# EAGLE board uRADMonitor Pops (EAGLE 7.1.0)
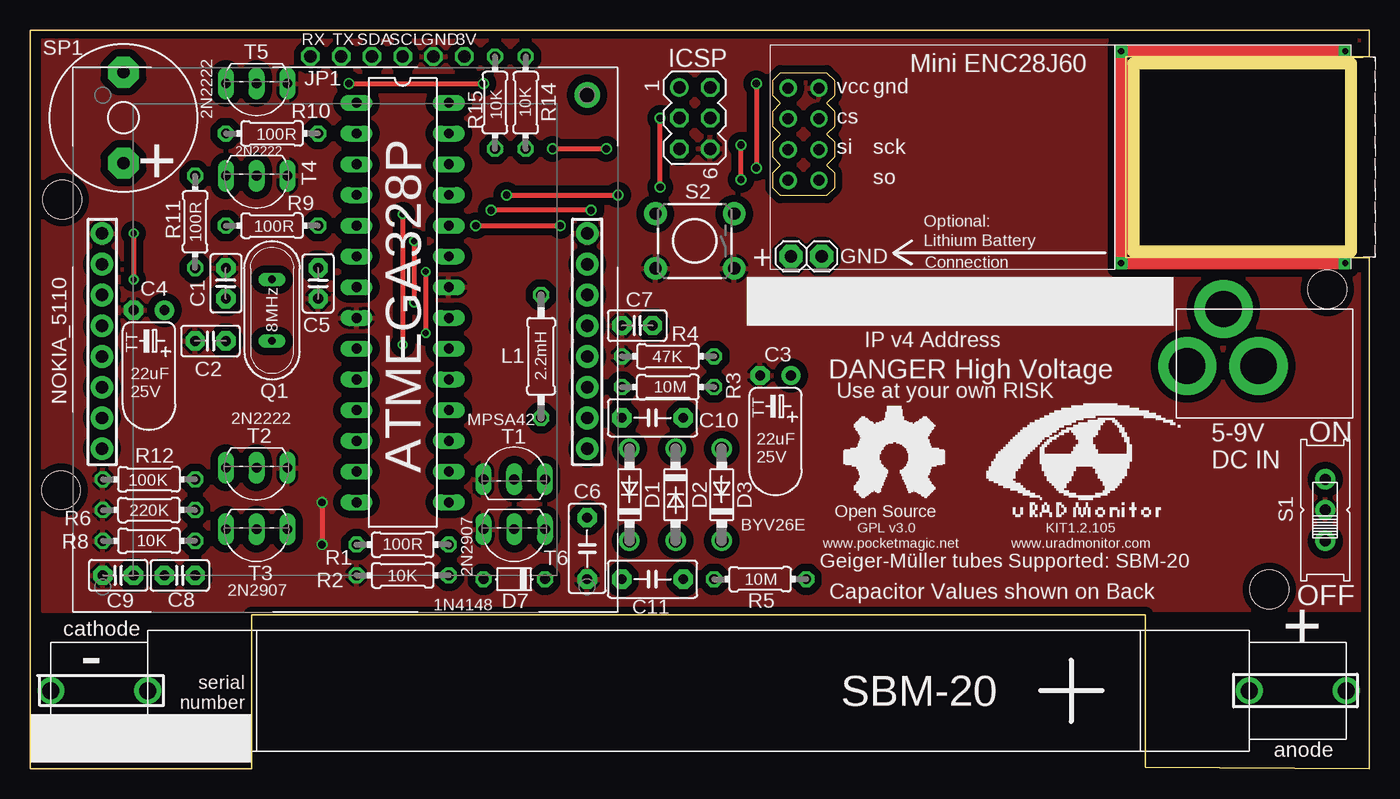
[diagram p0: board, top side]
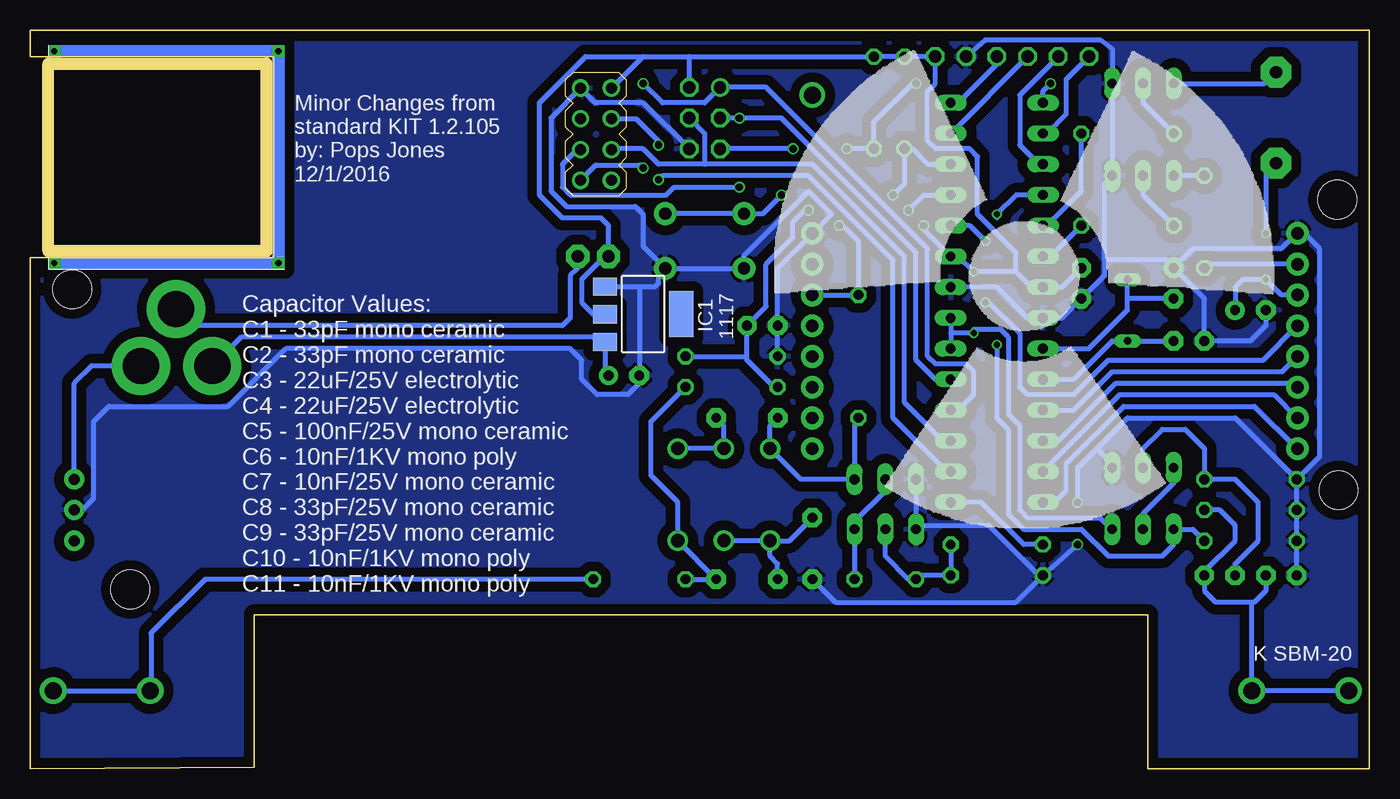
[diagram p1: board, bottom side, seen from below]

Size 110.6 x 61 mm. Coordinates in mm from the lower left corner, seen from the top.
Outline: 0,0 18.3,0 18.3,12.7 92.1,12.7 92.1,0.1 110.6,0 110.6,42.2 90.5,42.2 90.5,58.8 110.6,58.8 110.6,61 0,61 0,0
Copper layers (1*16): Top 0.035mm / dielectric 1.5mm / Bottom 0.035mm
Design rules "EagleRules": minimum track width 7mil, minimum drill 12mil, track to track 7mil, track to pad 7mil, pad to pad 7mil, via to via 7mil, smd to smd 0mil, copper to edge 20mil, drill to drill 10mil, minimum pad ring 10mil, minimum via ring 6mil, stop-mask expansion 2mil, vias tented up to drill 25mil, thermal gap 10mil
Holes 3.17 mm at 102.34,14.8 107.14,39.6 2.54,23 2.64,47

## Footprints (pad centres in the part's own frame; a part is rotated, then mirrored left to right if it is on the bottom)
1X01 = drill 1.016 pad 1.93 octagon: 1 0,0
DIL28-3 = drill 0.813 long: 1 -16.51,-3.81; 2 -13.97,-3.81; 3 -11.43,-3.81; 4 -8.89,-3.81; 5 -6.35,-3.81; 6 -3.81,-3.81; 7 -1.27,-3.81; 8 1.27,-3.81; 9 3.81,-3.81; 10 6.35,-3.81; 11 8.89,-3.81; 12 11.43,-3.81; 13 13.97,-3.81; 14 16.51,-3.81; 15 16.51,3.81; 16 13.97,3.81; 17 11.43,3.81; 18 8.89,3.81; 19 6.35,3.81; 20 3.81,3.81; 21 1.27,3.81; 22 -1.27,3.81; 23 -3.81,3.81; 24 -6.35,3.81; 25 -8.89,3.81; 26 -11.43,3.81; 27 -13.97,3.81; 28 -16.51,3.81
C2.5-2 = drill 0.813 pad 1.6 octagon: 1 -1.27,0; 2 1.27,0
TT2D4L = drill 0.813 pad 1.6: + -1.27,0 | drill 0.813 pad 1.6 octagon: - 1.27,0
C5B3 = drill 0.813 pad 1.6 octagon: 1 -2.54,0; 2 2.54,0
DO41-7.6 = drill 1.1 pad 1.7: A 3.81,0; C -3.81,0
D-5 = drill 0.813 octagon: A 2.54,0; C -2.54,0
PJ-102A = drill 3 pad 4.8: RING 0.1,-3.39; RING_SW -4.6,-6.29; TIP 0.1,-9.29
SOT223 = smd 1.499 x 2.007: 1 -2.261,-3.15; 2 0.025,-3.15; 3 2.311,-3.15 | smd 3.81 x 2.007: 4 0,3.15
ENC28J60_MINI = drill 0.9 pad 1.422: CS -21.503,3.433; GND -18.962,5.973; P$1 -21.503,-1.647; P$6 -18.962,3.433; SCK -18.962,0.892; SI -21.503,0.892; SO -18.962,-1.647; VCC -21.503,5.973 | drill 0.5 pad 1 square: P$2 24.5,9; P$3 24.5,-8.5; P$4 6,-8.5; P$5 6,9
MA03-2 = drill 1.016: 1 -2.54,-1.27 | drill 1.016 octagon: 2 -2.54,1.27; 3 0,-1.27; 4 0,1.27; 5 2.54,-1.27; 6 2.54,1.27
1X06-CLEAN = drill 1.016 octagon: 1 -6.35,0; 2 -3.81,0; 3 -1.27,0; 4 1.27,0; 5 3.81,0; 6 6.35,0
0207/10 = drill 0.813 octagon: 1 -5.08,0; 2 5.08,0
NOKIA5110 = drill 1.016 pad 1.88: CE@1 2.53,0; CE@2 2.53,40.08; CLK@1 10.15,0; CLK@2 10.15,40.08; DC@1 5.07,0; DC@2 5.07,40.08; DIN@1 7.61,0; DIN@2 7.61,40.08; GND@1 17.77,0; GND@2 17.77,40.08; LIGHT@1 15.23,0; LIGHT@2 15.23,40.08; RST@1 -0.01,0; RST@2 -0.01,40.08; VCC@1 12.69,0; VCC@2 12.69,40.08
QS = drill 0.61 long: 1 -2.54,0; 2 2.54,0
0204/7 = drill 0.813 octagon: 1 -3.81,0; 2 3.81,0
EG1218 = drill 0.9 pad 1.676: O -2.54,0; P 0,0; S 2.54,0
TACTILE-PTH = drill 1.016 pad 1.88: 1 -3.251,2.261; 2 3.251,2.261; 3 -3.251,-2.261; 4 3.251,-2.261
AL60P = drill 1.016 pad 2.54 octagon: 1 -3.759,0; 2 3.759,0
TO92-EBC-OVAL = drill 0.813 long: B 0,-1.27; C 2.54,-1.27; E -2.54,-1.27
TO92-EBC = drill 0.813 long: B 0,-1.27; C 2.54,-1.27; E -2.54,-1.27
GEIGERTUBE_SBM20_6MM_HOLDERS = drill 1.4 pad 2.2: ANODE$1 47.5,0; ANODE$2 55.5,0; CATHODE$1 -51.5,0; CATHODE$2 -43.5,0

## Placement (x,y rotation side)
+3V_BAT  pin 1x1  [1X01]  62.83,42.31 0 top
ATMEGA328P  ATMEGA328P  [DIL28-3]  30.76,38.5 270 top
C1  33pF  [C2.5-2]  16.16,40.09 270 top
C2  33pF  [C2.5-2]  14.89,35.33 0 top
C3  22u / 25V  [TT2D4L]  61.56,32.47 180 top
C4  22u / 25V  [TT2D4L]  9.81,37.87 180 top
C5  100nF  [C2.5-2]  23.78,40.09 90 top
C6  10nF/1KV  [C5B3]  46,18.19 270 top
C7  10nF  [C2.5-2]  50.13,36.6 0 top
C8  33pF  [C2.5-2]  12.35,15.96 0 top
C9  33pF  [C2.5-2]  7.27,15.96 180 top
C10  10nF/1KV  [C5B3]  51.4,28.98 180 top
C11  10nF/1KV  [C5B3]  51.4,15.65 180 top
D1  BYV26E  [DO41-7.6]  49.5,22.63 90 top
D2  BYV26E  [DO41-7.6]  53.3,22.63 270 top
D3  BYV26E  [DO41-7.6]  57.12,22.63 90 top
D7  1N4148  [D-5]  39.97,15.65 180 top
DC_IN_JACK  DC IN JACK  [PJ-102A]  104.85,33.36 270 top
GND  pin 1x1  [1X01]  65.37,42.31 0 top
IC1  REG1117  [SOT223]  59.97,37.55 270 bottom
IC2  ENC28J60_MINI  [ENC28J60_MINI]  84.1,50.25 0 top
ISP_6PIN  pin 2x3  [MA03-2]  54.89,53.74 270 top
JP1  pin 1x6  [1X06-CLEAN]  29.49,58.83 0 top
L1  2.2mH  [0207/10]  42.19,34.06 270 top
NOKIA_5110  NOKIA_5110_LCD  [NOKIA5110]  46,26.44 90 top
Q1  8Mhz  [QS]  19.97,37.87 90 top
R1  100  [0204/7]  30.76,18.5 0 top
R2  10K  [0204/7]  30.76,15.96 0 top
R3  10M  [0204/7]  52.67,31.52 0 top
R4  47K  [0204/7]  52.67,34.06 180 top
R5  10M  [0204/7]  60.29,15.65 0 top
R6  220K  [0204/7]  9.81,21.36 0 top
R8  10K  [0204/7]  9.81,18.82 180 top
R9  100  [0204/7]  19.97,44.86 180 top
R10  100  [0204/7]  19.97,52.48 180 top
R11  100  [0204/7]  13.62,45.17 90 top
R12  100K  [0204/7]  9.81,23.9 180 top
R14  10K  [0204/7]  40.92,55.02 90 top
R15  10K  [0204/7]  38.38,55.02 90 top
S1  Toggle switch  [EG1218]  106.96,21.36 90 top
S2  Momentary switch  [TACTILE-PTH]  54.89,43.59 180 top
SP1  SPEAKER  [AL60P]  7.7,53.77 90 top
T1  MPSA42  [TO92-EBC-OVAL]  39.97,25.17 0 top
T2  2N2222  [TO92-EBC]  18.7,23.58 180 top
T3  2N2907  [TO92-EBC-OVAL]  18.7,18.5 180 top
T4  2N2222  [TO92-EBC]  18.7,47.71 180 top
T5  2N2222  [TO92-EBC-OVAL]  18.7,55.33 180 top
T6  2N2907  [TO92-EBC-OVAL]  39.97,18.5 180 top
TUBE1  GEIGERTUBE_SBM20_6MM_HOLDERS  [GEIGERTUBE_SBM20_6MM_HOLDERS]  53.2,6.43 0 top

## Library data of the parts
+3V_BAT DC_IN_JACK GND JP1 S1 SP1 T1 T3 T5 T6 = adafruit
ATMEGA328P = atmel; OC_FARNELL: unknown; OC_NEWARK: unknown
C1 C2 C5-C11 = capacitor-wima
C3 C4 L1 R1-R6 R8-R12 R14 R15 = rcl
D1-D3 D7 = diode
IC1 = burr-brown; MPN: REG1117; OC_FARNELL: 1097566; OC_NEWARK: 14P6981
IC2 TUBE1 = uradmonitor
ISP_6PIN = con-lstb; OC_FARNELL: unknown; OC_NEWARK: unknown
NOKIA_5110 = pocketmagic
Q1 = special
S2 = sparkfun-electromechanical
T2 T4 = transistor-neu-to92

## Nets
BUTTON_SIGNAL: ATMEGA328P.26 R15.1 S2.3 S2.4
CS_ETH: ATMEGA328P.16 IC2.CS
GND: ATMEGA328P.8 ATMEGA328P.22 C1.1 C2.1 C3.- C4.- C5.1 C6.2 C7.1 C9.2 IC1.1 IC2.GND ISP_6PIN.6 JP1.5 NOKIA_5110.GND@1 NOKIA_5110.GND@2 R2.1 R4.2 R6.1 R8.2 R12.2 S1.P S2.1 S2.2 T1.E T2.E T4.E T5.E T6.C
MCU_HV_ADC: ATMEGA328P.25 C7.2 R3.1 R4.1
MCU_INT0: ATMEGA328P.4 R8.1 T3.C
MCU_MISO: ATMEGA328P.18 IC2.SO ISP_6PIN.1
MCU_MOSI: ATMEGA328P.17 IC2.SI ISP_6PIN.4
MCU_PWM_INVERTER: ATMEGA328P.15 R1.1
MCU_RESET: ATMEGA328P.1 ISP_6PIN.5 R14.1
MCU_RX: ATMEGA328P.2 JP1.1
MCU_SCK: ATMEGA328P.19 IC2.SCK ISP_6PIN.3
MCU_SCL: ATMEGA328P.28 JP1.4
MCU_SDA: ATMEGA328P.27 JP1.3
MCU_TX: ATMEGA328P.3 JP1.2
N$1: ATMEGA328P.9 C1.2 Q1.2
N$2: ATMEGA328P.10 C2.2 Q1.1
N$3: R11.2 T4.C
N$4: R5.2 TUBE1.ANODE$1 TUBE1.ANODE$2
N$7: R9.2 T4.B
N$9: NOKIA_5110.LIGHT@1 NOKIA_5110.LIGHT@2 R11.1
N$10: C10.2 D1.A L1.2 T1.C
N$13: ATMEGA328P.24 NOKIA_5110.CLK@1 NOKIA_5110.CLK@2
N$15: DC_IN_JACK.RING S1.S
N$16: C10.1 D2.C D3.A
N$20: DC_IN_JACK.RING_SW GND.1
N$21: ATMEGA328P.11 NOKIA_5110.DIN@1 NOKIA_5110.DIN@2
N$22: ATMEGA328P.12 NOKIA_5110.DC@1 NOKIA_5110.DC@2
N$23: ATMEGA328P.13 NOKIA_5110.CE@1 NOKIA_5110.CE@2
N$24: ATMEGA328P.14 NOKIA_5110.RST@1 NOKIA_5110.RST@2
N$27: D7.A R1.2 R2.2 T6.B
N$28: C3.+ DC_IN_JACK.TIP IC1.3
N$30: C6.1 C11.2 D1.C D2.A
N$31: C11.1 D3.C R3.2 R5.1
N$34: ATMEGA328P.6 R9.1
N$40: SP1.2 T5.C
N$41: R10.2 T5.B
N$52: C8.2 C9.1 R6.2 TUBE1.CATHODE$1 TUBE1.CATHODE$2
N$56: C8.1 R12.1 T2.B
N$59: T2.C T3.B
N$74: D7.C T1.B T6.E
SPEAKER_CONTROL: ATMEGA328P.5 R10.1
VCC_3V: +3V_BAT.1 ATMEGA328P.7 ATMEGA328P.20 ATMEGA328P.21 ATMEGA328P.23 C4.+ C5.2 IC1.2 IC2.VCC ISP_6PIN.2 JP1.6 L1.1 NOKIA_5110.VCC@1 NOKIA_5110.VCC@2 R14.2 R15.2 SP1.1 T3.E

## Tracks (layer width: path | path; a pad name or v marks a point on that pad's centre or on a via)
BUTTON_SIGNAL  (via drill 0.6 pad 0.25)
  Top 0.406: v39.34,47.39 v48.54,47.39
  Bottom 0.406: 35.52,49.94 ATMEGA328P.26 36.48,49.94 37.75,51.2 R15.1 38.38,48.35 v39.34,47.39 | S2.3 S2.4 50.09,45.85 v48.54,47.39
CS_ETH  (via drill 0.6 pad 0.3)
  Top 0.406: v58.7,48.66 v58.7,51.52
  Bottom 0.406: v58.7,48.66 58.38,48.98 46.32,48.98 39.34,42 39.34,28.98 34.89,24.53 ATMEGA328P.16 | IC2.CS 60.55,53.69 58.7,51.84 v58.7,51.52
GND  (via drill 0.6 pad 0.25)
  Top 0.406: v24.1,21.99 v24.1,18.5
  Bottom 0.406: R12.2 R6.1 R8.2 C9.2 | JP1.5 31.71,60.21 22.19,60.21 21.24,59.46 T5.E T4.E 21.87,48.35 21.87,42 | R12.2 4.09,25.8 4.09,42.95 5.36,44.22 NOKIA_5110.GND@2 5.93,44.22 6,44.22 7.27,42.95 14.57,42.95 15.52,42 | ATMEGA328P.22 30.76,39.77 28.22,37.23 ATMEGA328P.8 25.37,37.23 C5.1 21.87,40.73 21.87,42 | 15.52,42 C1.1 13.62,38.82 C2.1 9.81,35.33 8.54,36.6 C4.- | 15.52,42 21.87,42 | ISP_6PIN.6 59.97,55.02 63.93,55.02 IC2.GND 65.14,56.2 67.59,53.74 67.59,47.71 66.32,46.44 60.61,46.44 59.97,45.81 59.97,43.15 S2.1 | 22.51,26.44 24.1,24.85 v24.1,21.99 | 22.51,26.44 19.97,28.98 11.08,28.98 R12.2 | R2.1 v24.1,18.5 | T1.E 37.43,20.09 | T6.C 37.43,20.09 | 37.43,20.09 31.4,20.09 27.27,15.96 R2.1 | R2.1 29.18,13.74 44.1,13.74 C6.2 | R4.2 C7.1 48.86,41.35 NOKIA_5110.GND@1 | NOKIA_5110.GND@1 | NOKIA_5110.GND@1 44.41,45.81 46.32,47.71 51.64,42.39 S2.2 S2.1 | S2.1 58.14,41.29 | S2.1 58.7,40.77 58.7,40.09 58.98,39.81 IC1.1 60.33,39.81 60.29,39.77 C3.- 60.29,31.84 61.24,30.89 63.78,30.89 65.05,32.16 65.05,33.74 66,34.7 89.5,34.7 94.26,29.93 104.1,29.93 105.38,28.66 105.38,22.31 106.33,21.36 S1.P | T2.E 21.24,25.17 22.51,26.44
  pour Top (isolate 0.61): 1.1,60.5 110.2,60.5 110.2,58.9 90.3,58.9 90.3,42 110.1,41.9 109.8,13.1 1.1,13
  pour Bottom (isolate 0.813): 1.1,60.5 109.6,60.7 110,60.7 110,59 90.4,59 90.4,41.9 110.1,41.9 110.1,41.6 109.7,0.4 92.4,0.3 92.4,12.9 17.8,12.9 17.8,0.5 1.1,0.5
MCU_HV_ADC  (via drill 0.6 pad 0.25)
  Top 0.406: v46.32,46.12 v38.07,46.12
  Bottom 0.406: ATMEGA328P.25 36.8,47.39 v38.07,46.12 | R3.1 49.18,31.52 51.4,33.74 51.4,34.06 | 51.4,34.06 C7.2 49.81,38.19 49.81,41.68 47.59,43.9 47.59,45.17 46.64,46.12 v46.32,46.12 | R4.1 51.4,34.06
MCU_INT0  (via drill 0.5 pad 0.25)
  Top 0.406: v30.77,45.79 30.78,45.48 30.76,45.49 v30.76,35.01
  Bottom 0.406: v30.76,35.01 30.76,28.98 29.81,28.03 29.81,21.04 28.54,19.77 23.78,19.77 21.55,17.55 17.11,17.55 16.16,18.5 T3.C 14.57,19.77 R8.1 | 30.75,45.49 v30.77,45.79 29.16,47.39 ATMEGA328P.4
MCU_MISO  (via drill 0.6 pad 0.25)
  Top 0.406: v59.97,56.6 v59.97,49.62
  Bottom 0.406: IC2.SO 63.9,49.86 60.21,49.86 v59.97,49.62 | v59.97,56.6 58.38,55.02 54.89,55.02 ISP_6PIN.1 49.81,56.28 36.48,42.95 36.48,34.06 35.84,33.42 33.3,33.42 32.67,32.79 32.67,30.89 33.94,29.62 ATMEGA328P.18
MCU_MOSI
  Bottom 0.406: 54.89,49.94 46,49.94 38.38,42.31 38.38,30.25 35.21,27.08 ATMEGA328P.17 | ISP_6PIN.4 54.89,52.48 54.89,49.94 | 54.89,49.94 58.7,49.94 59.97,51.2 62.54,51.2 IC2.SI
MCU_PWM_INVERTER
  Bottom 0.406: R1.1 28.54,18.5 32.03,21.99 ATMEGA328P.15
MCU_RESET  (via drill 0.6 pad 0.25, 0.6 pad 0.41)
  Top 0.406: v26.32,56.6 v37.43,56.6 | v43.15,51.2 v47.59,51.2
  Bottom 0.406: ATMEGA328P.1 26.95,55.97 v26.32,56.6 | v37.43,56.6 37.75,56.6 40.92,53.43 R14.1 v43.15,51.2 | v47.59,51.2 ISP_6PIN.5
MCU_RX
  Bottom 0.406: JP1.1 25.05,56.92 25.05,54.06 26.64,52.48 ATMEGA328P.2
MCU_SCK  (via drill 0.6 pad 0.25)
  Top 0.406: v52.04,48.03 v52.04,53.74
  Bottom 0.406: IC2.SCK 65.2,51.2 65.37,51.2 66.64,49.94 66.64,48.03 66,47.39 58.07,47.39 57.43,48.03 v52.04,48.03 | ATMEGA328P.19 35.84,32.16 37.43,33.74 37.43,42.63 48.54,53.74 v52.04,53.74 ISP_6PIN.3
MCU_SCL
  Bottom 0.406: JP1.4 30.76,58.19 33.94,55.02 ATMEGA328P.28
MCU_SDA
  Bottom 0.406: JP1.3 ATMEGA328P.27
MCU_TX
  Bottom 0.406: ATMEGA328P.3 27.27,49.94 28.86,51.52 28.86,55.65 JP1.2
N$1
  Bottom 0.406: ATMEGA328P.9 23.14,34.7 19.97,37.87 19.97,38.82 | 19.97,38.82 Q1.2 | C1.2 19.97,38.82
N$2
  Bottom 0.406: C2.2 Q1.1 21.24,35.33 24.41,32.16 ATMEGA328P.10
N$3
  Bottom 0.406: R11.2 T4.C
N$4
  Bottom 0.406: TUBE1.ANODE$2 TUBE1.ANODE$1 100.61,6.43 100.61,11.2 96.17,15.65 R5.2
N$7
  Bottom 0.406: T4.B 18.7,47.39 R9.2
N$9
  Bottom 0.406: NOKIA_5110.LIGHT@2 13.31,41.67 R11.1
N$10
  Bottom 0.406: C10.2 49.5,28.34 D1.A 46.95,23.9 T1.C 42.51,28.66 L1.2
N$13  (via drill 0.5 pad 0.25)
  Top 0.406: v31.71,43.59 v31.71,38.5
  Bottom 0.406: 5.93,36.6 NOKIA_5110.CLK@2 8.77,33.74 21.55,33.74 24.41,30.89 28.22,30.89 28.86,31.52 28.86,35.97 31.4,38.5 v31.71,38.5 | ATMEGA328P.24 32.98,44.86 v31.71,43.59
N$15
  Bottom 0.406: DC_IN_JACK.RING 105.54,33.26 106.96,31.84 S1.S
N$16
  Bottom 0.406: D3.A D2.C 53.3,28.34 C10.1
N$20
  Bottom 0.406: GND.1 65.37,41.36 66,40.73 66,37.23 66.64,36.6 97.2,36.6 DC_IN_JACK.RING_SW
N$21
  Bottom 0.406: ATMEGA328P.11 24.41,29.62 21.24,32.79 7.18,32.79 NOKIA_5110.DIN@2
N$22
  Bottom 0.406: ATMEGA328P.12 25.68,27.08 20.92,31.84 6.31,31.84 6,31.52 5.93,31.52 NOKIA_5110.DC@2
N$23
  Bottom 0.406: NOKIA_5110.CE@2 5.93,28.98 6,28.98 7.9,30.89 20.6,30.89 ATMEGA328P.13
N$24
  Bottom 0.406: NOKIA_5110.RST@2 5.93,26.44 6,26.44 9.49,29.93 20.29,29.93 25.05,25.17 25.05,22.95 26,21.99 ATMEGA328P.14
N$27
  Bottom 0.406: R1.2 R2.2 37.11,15.96 D7.A 38.07,15.65 39.97,17.55 T6.B
N$28
  Bottom 0.406: 63.03,35.33 IC1.3 | IC1.3 63.69,35.24 64.1,35.65 93.17,35.65 DC_IN_JACK.TIP | IC1.3 63.12,32.77 C3.+
N$30
  Bottom 0.406: D1.C 47.91,18.82 C6.1 | D1.C D2.A | C11.2 48.86,16.91 49.5,17.55 D1.C
N$31
  Bottom 0.406: R3.2 59.34,28.66 59.34,24.22 57.12,21.99 D3.C C11.1 R5.1
N$34
  Bottom 0.406: ATMEGA328P.6 26.32,42.31 R9.1
N$40
  Bottom 0.406: T5.C 8.63,56.6 SP1.2
N$41
  Bottom 0.406: T5.B 18.7,55.02 R10.2
N$45  (via drill 1.4)
  other vias: 46,55.65
N$52
  Bottom 0.406: R6.2 12.35,21.36 11.08,20.09 11.08,18.82 13.62,16.28 C8.2 13.62,14.69 12.66,13.74 9.81,13.74 | C9.1 8.54,14.69 9.49,13.74 9.81,13.74 | 9.81,13.74 9.7,13.63 TUBE1.CATHODE$2 TUBE1.CATHODE$1
N$56
  Bottom 0.406: C8.1 11.08,16.91 9.17,18.82 9.17,21.99 11.08,23.9 R12.1 13.62,26.44 15.21,28.03 17.11,28.03 18.7,26.44 T2.B
N$59
  Bottom 0.406: T3.B 18.7,21.04 16.16,23.58 T2.C
N$74
  Bottom 0.406: D7.C T6.E 42.51,20.41 39.97,22.95 T1.B
SPEAKER_CONTROL
  Bottom 0.406: ATMEGA328P.5 26.64,44.86 23.78,47.71 R10.1
VCC_3V  (via drill 0.5 pad 0.25, 0.6 pad 0.25)
  Top 0.406: v32.67,41.05 v32.67,35.97 | v8.54,44.22 v8.54,40.41 | v36.8,44.86 v43.78,44.86
  Bottom 0.406: 29.18,41.05 27.91,39.77 ATMEGA328P.7 25.37,39.77 C5.2 | 29.18,41.05 v32.67,41.05 33.94,42.31 ATMEGA328P.23 36.8,44.54 v36.8,44.86 | NOKIA_5110.VCC@1 | 29.18,41.05 29.18,42.63 32.35,45.81 32.35,50.57 32.98,51.2 35.84,51.2 36.48,51.84 36.48,55.97 35.84,56.6 JP1.6 R15.2 R14.2 56.16,58.83 | SP1.1 7.82,50.02 8.54,49.3 v8.54,44.22 | ATMEGA328P.21 34.57,35.97 | 34.57,35.97 ATMEGA328P.20 | 34.57,35.97 v32.67,35.97 32.67,36.28 30.45,36.28 29.81,35.65 29.81,29.3 28.86,28.34 28.86,21.36 28.22,20.73 22.19,20.73 T3.E | ISP_6PIN.2 56.16,58.83 | NOKIA_5110.VCC@1 42.52,39.13 L1.1 42.19,43.59 43.46,44.86 v43.78,44.86 | IC2.VCC 62.57,56.23 59.97,58.83 | 59.97,58.83 56.16,58.83 | IC1.2 64.08,37.53 65.05,38.5 65.05,40.41 63.15,42.31 +3V_BAT.1 62.83,44.86 63.47,45.49 66.64,45.49 68.54,47.39 68.54,55.02 64.73,58.83 59.97,58.83 | NOKIA_5110.VCC@2 7.26,39.13 v8.54,40.41 10.44,40.41 11.08,39.77 C4.+

## Text on the board
tPlace: Open Source | GPL v3.0 | www.pocketmagic.net
tNames: RX | TX | SDA | SCL | GND | 3V | Mini ENC28J60 | ICSP | 10K | 10K | 2N2222 | 100R | 2N2222 | + | 100R | Optional: | 100R | Lithium Battery | + | Connection | 8MHz | IP v4 Address | 47K | 2.2mH | DANGER High Voltage | 22uF / 25V | 10M | Use at your own RISK | 2N2222 | MPSA42 | ON | 22uF / 25V | 5-9V / DC IN | 100K | 220K | BYV26E | KIT1.2.105 | 10K | 100R | www.uradmonitor.com | Geiger-Müller tubes Supported: SBM-20 | 2N2907 | 10K | 10M | 2N2907 | Capacitor Values shown on Back | OFF | 1N4148 | + | serial / number | -
bNames: Minor Changes from / standard KIT 1.2.105 / by: Pops Jones / 12/1/2016 | 1117 | Capacitor Values: / C1 - 33pF mono ceramic / C2 - 33pF mono ceramic / C3 - 22uF/25V electrolytic / C4 - 22uF/25V electrolytic / C5 - 100nF/25V mono ceramic / C6 - 10nF/1KV mono poly / C7 - 10nF/25V mono ceramic / C8 - 33pF/25V mono ceramic / C9 - 33pF/25V mono ceramic / C10 - 10nF/1KV mono poly / C11 - 10nF/1KV mono poly | K SBM-20